# EAGLE board MARI BRD (EAGLE 9.7.0)
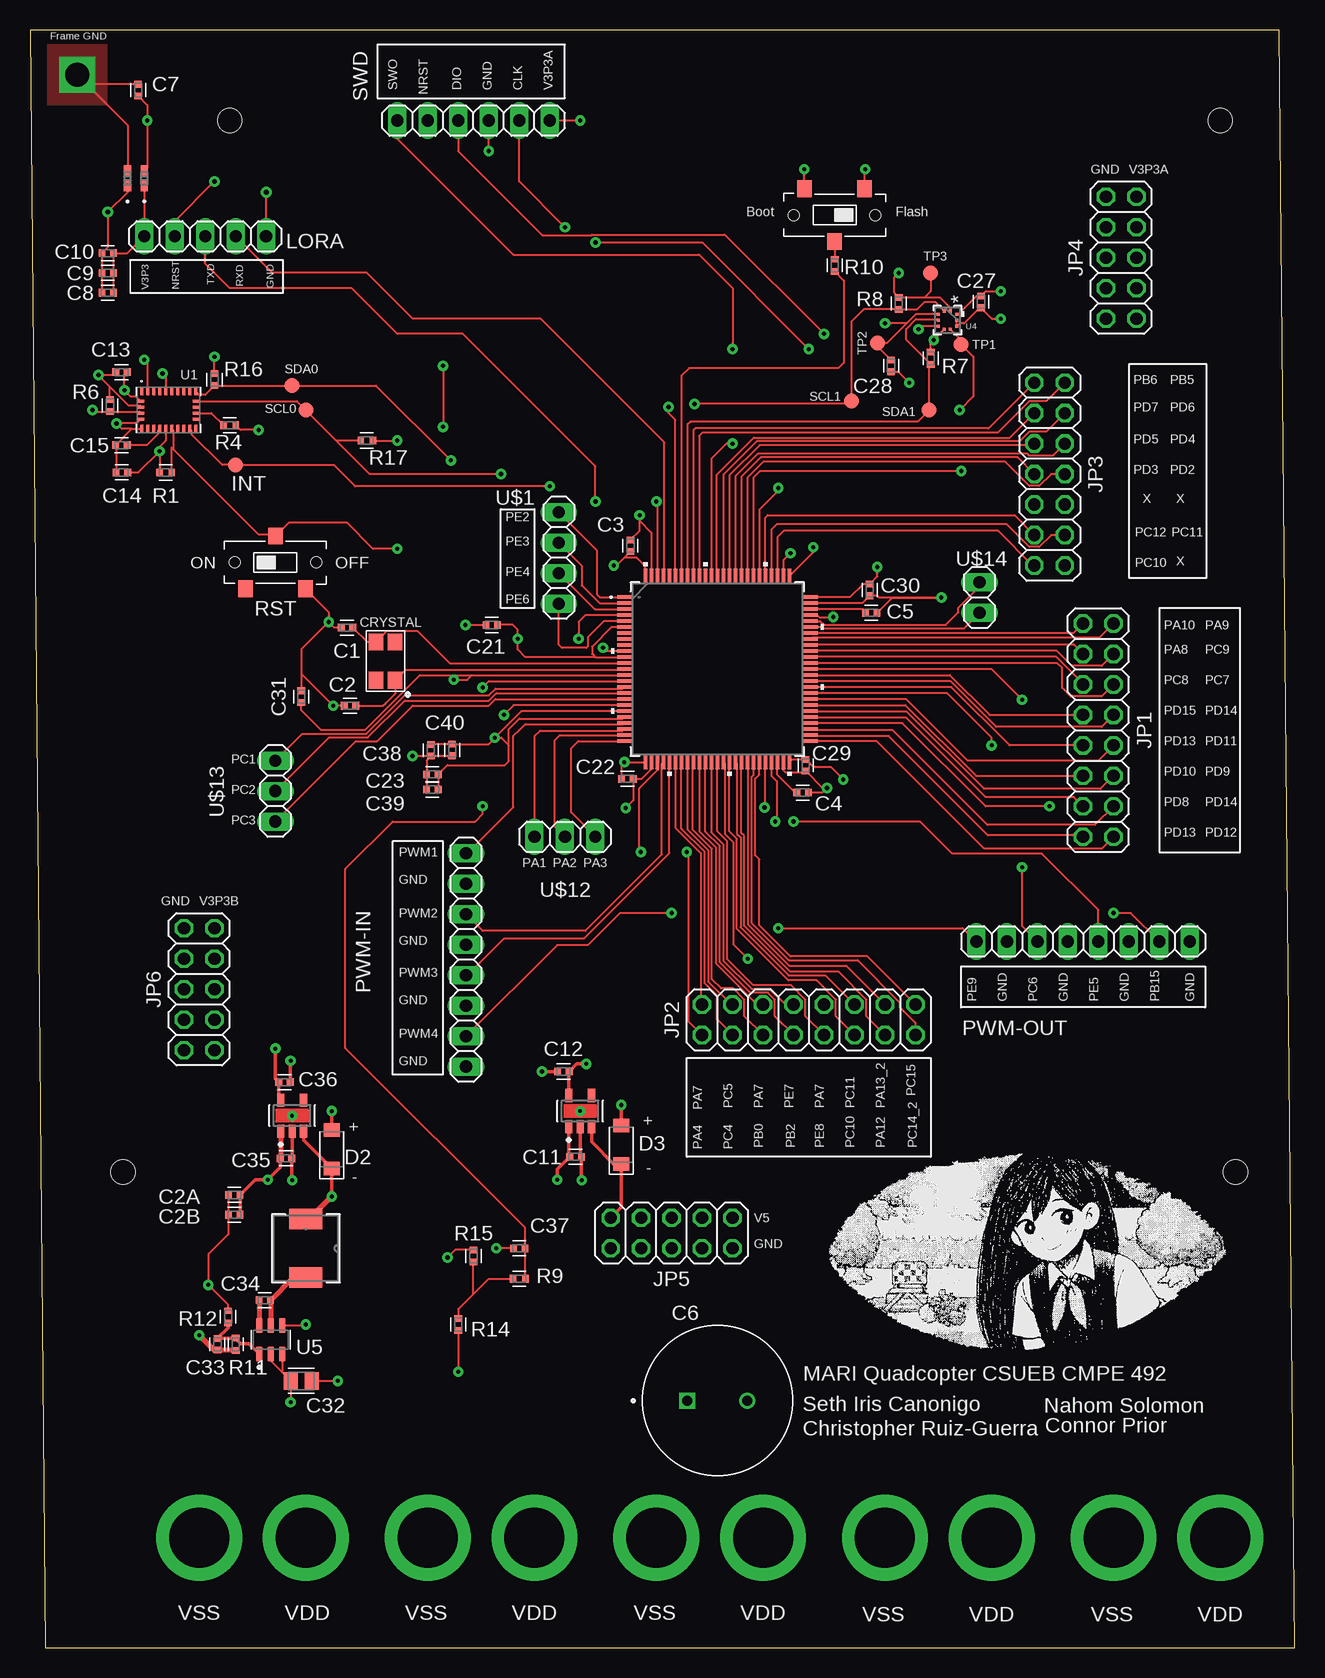
[diagram p0: board, top side]
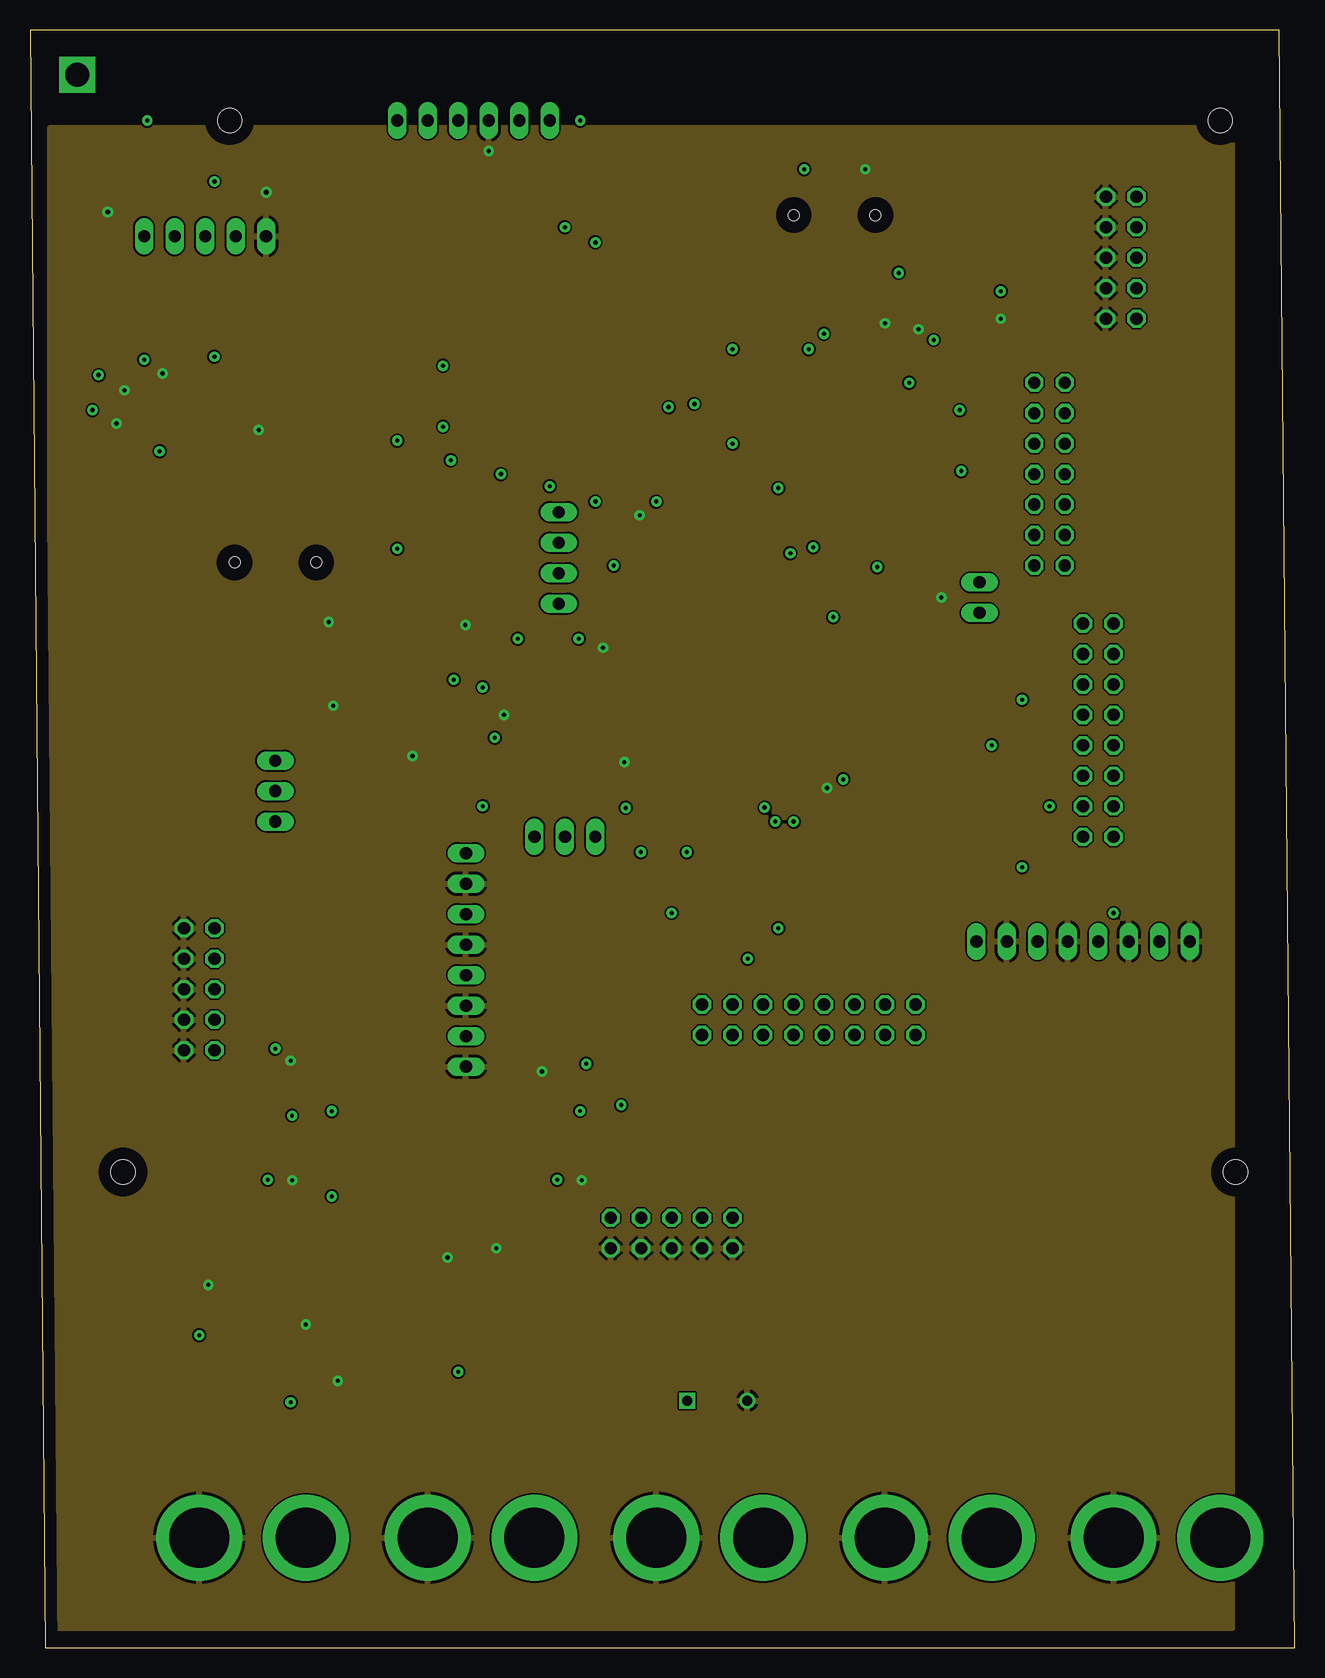
[diagram p1: board, inner layer Route2]
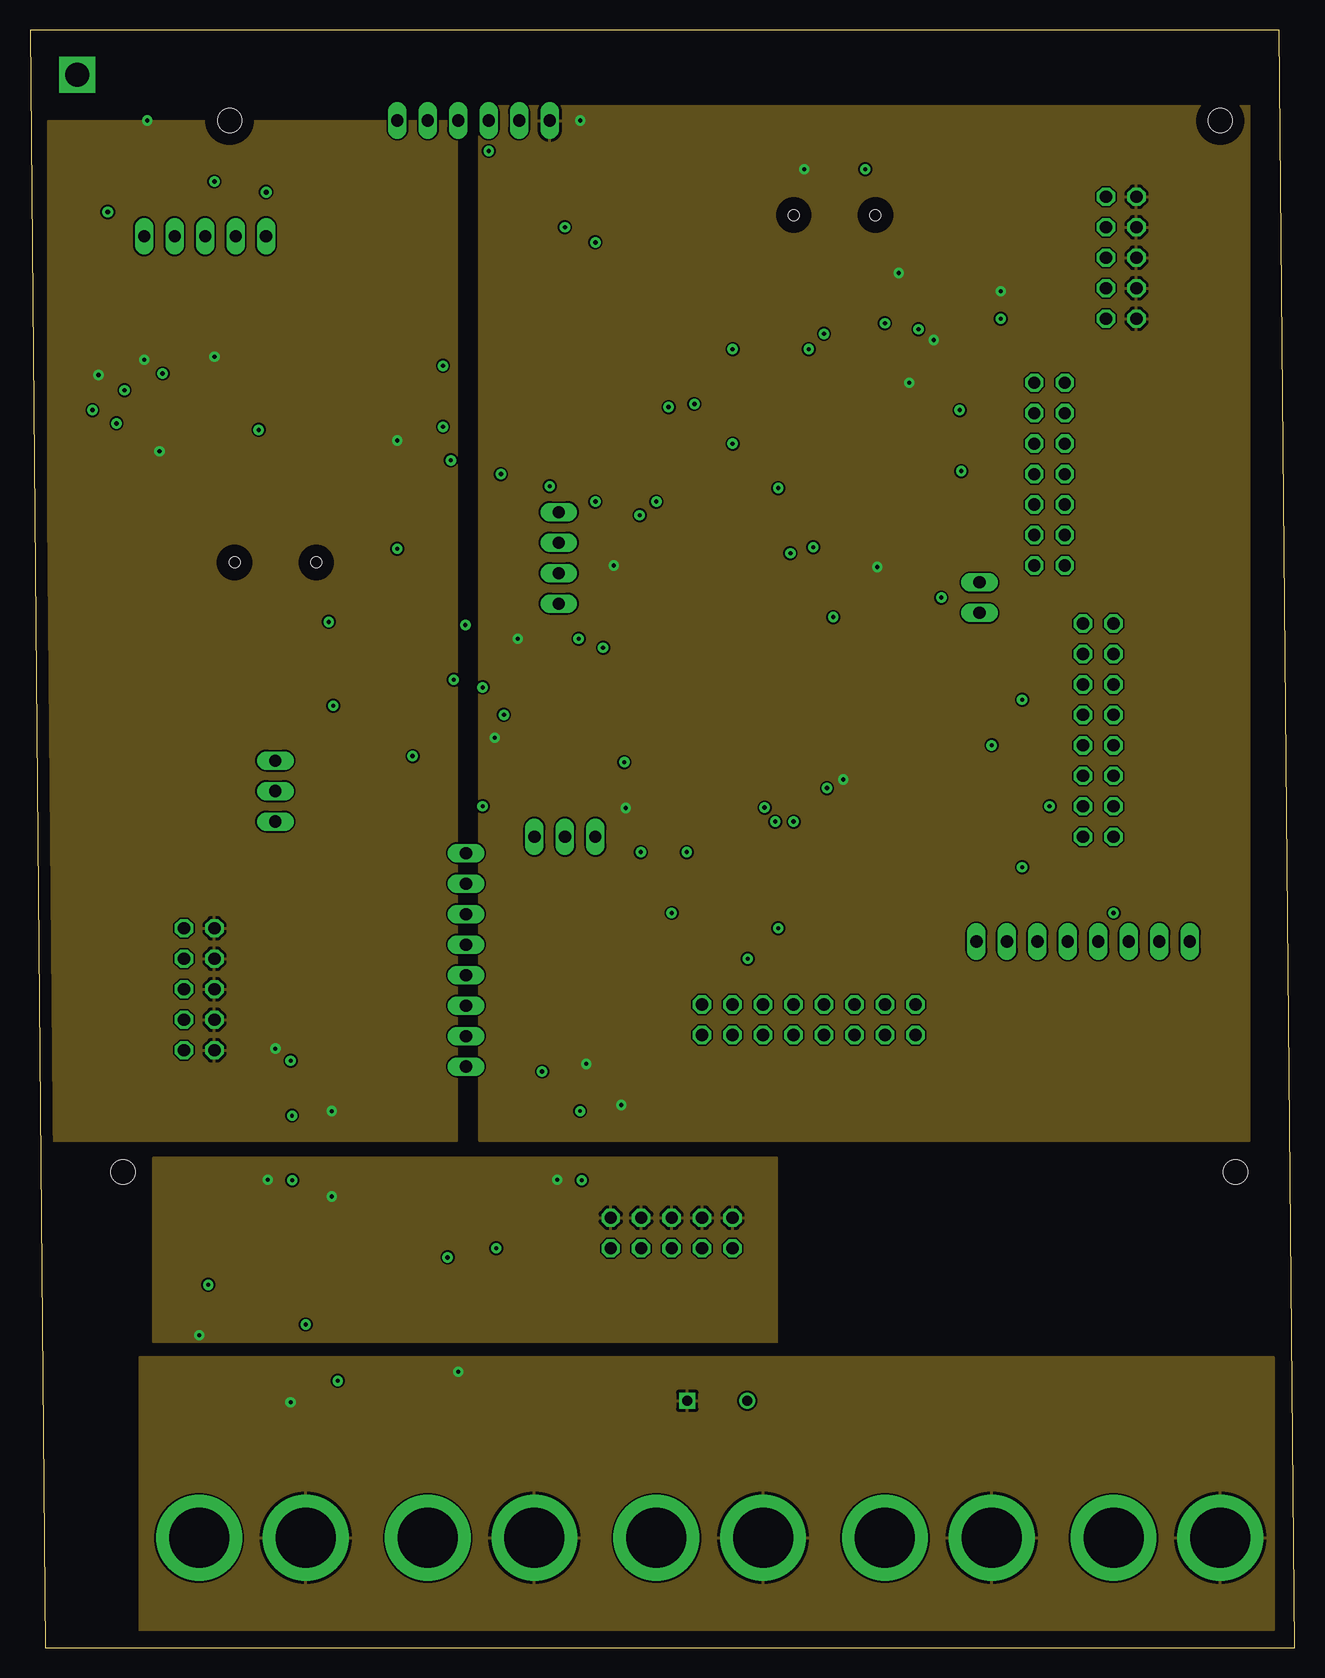
[diagram p2: board, inner layer Route15]
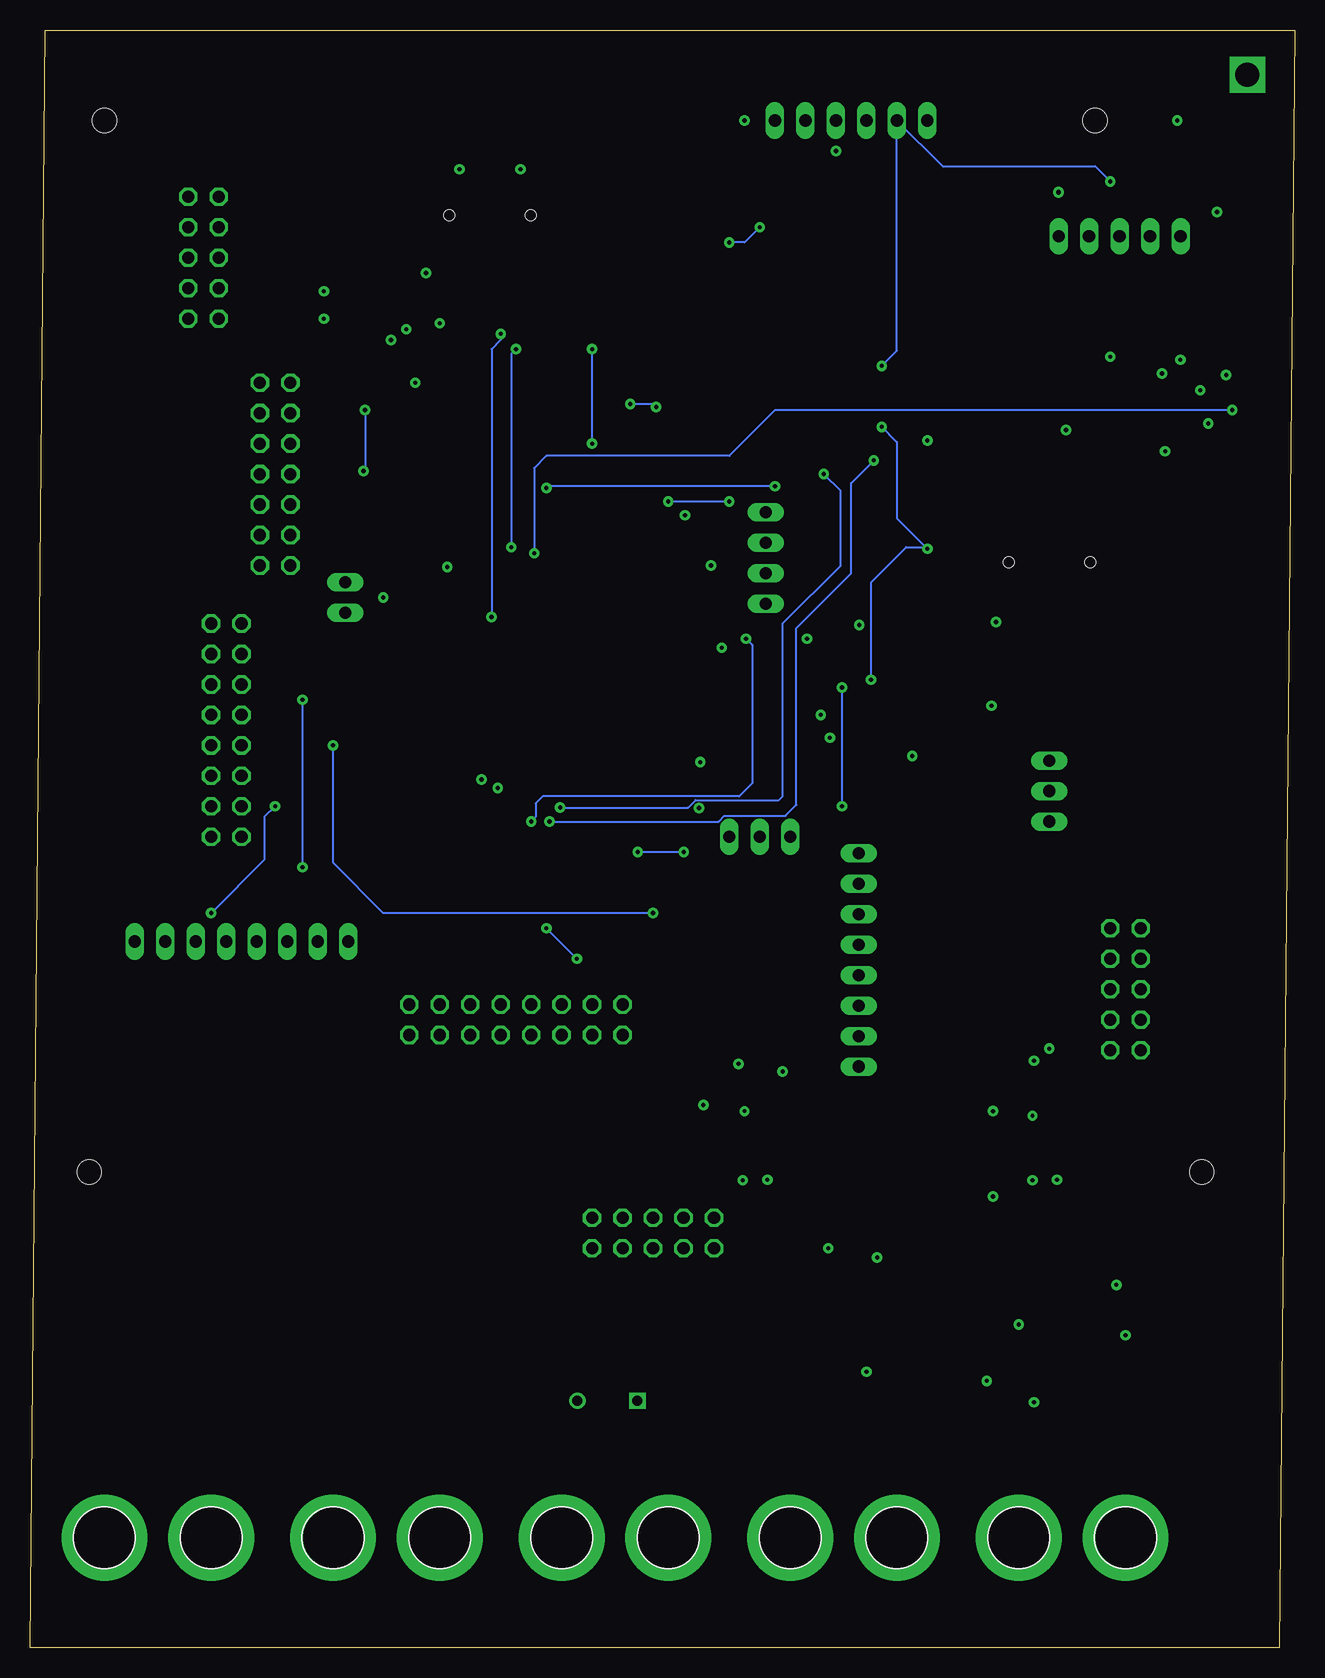
[diagram p3: board, bottom side, seen from below]

Size 105.39 x 134.8 mm. Coordinates in mm from the lower left corner, seen from the top.
Outline: 1.27,0 105.39,0 104.12,134.8 0,134.8 1.27,0
Copper layers (1*2*15*16): Top 0.035559375mm / dielectric 62mil / Route2 0.035559375mm / dielectric 62mil / Route15 0.035559375mm / dielectric 62mil / Bottom 0.035559375mm
Design rules "cmpe492-4Layer.edru": minimum track width 6mil, minimum drill 8mil, track to track 6mil, track to pad 6mil, pad to pad 6mil, via to via 6mil, smd to smd 6mil, copper to edge 40mil, drill to drill 20mil, minimum pad ring 10mil, minimum via ring 10mil, stop-mask expansion 4mil, vias tented up to drill 0mil, thermal gap 10mil
Holes 2 mm at 99.19,127.25 16.64,127.25 7.75,39.62 100.46,39.62

## Footprints (pad centres in the part's own frame; a part is rotated, then mirrored left to right if it is on the bottom)
CL-SB-12B-01T = smd 1.2 x 1.4: 1 -2.5,-2.2; 3 2.5,-2.2; C 0,2.2 | hole 0.9: -3.4,0; 3.4,0
CAPC1005X60 = smd 0.56 x 0.629: 1 -0.485,0; 2 0.485,0
CAPPRD500W60D1250H2200 = drill 0.85 pad 1.2 square: 1 -2.5,0 | drill 0.85 pad 1.2: 2 2.5,0
CAPC2012X110 = smd 1.165 x 1.465: 1 -0.875,0; 2 0.875,0
STDCRG1-16M = smd 1.4 x 1.2: P$1 -2.2,-1.6; P$2 1,-1.6; P$3 1,0; P$4 -2.2,0
SODFL3718X115 = smd 1.115 x 1.361: 1 -1.6,0; 2 1.6,0
B1,27 = smd 1.27 x 1.27: TP 0,0
2X08 = drill 1.016 octagon: 1 -8.89,-1.27; 2 -8.89,1.27; 3 -6.35,-1.27; 4 -6.35,1.27; 5 -3.81,-1.27; 6 -3.81,1.27; 7 -1.27,-1.27; 8 -1.27,1.27; 9 1.27,-1.27; 10 1.27,1.27; 11 3.81,-1.27; 12 3.81,1.27; 13 6.35,-1.27; 14 6.35,1.27; 15 8.89,-1.27; 16 8.89,1.27
2X07 = drill 1.016 octagon: 1 -7.62,-1.27; 2 -7.62,1.27; 3 -5.08,-1.27; 4 -5.08,1.27; 5 -2.54,-1.27; 6 -2.54,1.27; 7 0,-1.27; 8 0,1.27; 9 2.54,-1.27; 10 2.54,1.27; 11 5.08,-1.27; 12 5.08,1.27; 13 7.62,-1.27; 14 7.62,1.27
2X05 = drill 1.016 octagon: 1 -5.08,-1.27; 2 -5.08,1.27; 3 -2.54,-1.27; 4 -2.54,1.27; 5 0,-1.27; 6 0,1.27; 7 2.54,-1.27; 8 2.54,1.27; 9 5.08,-1.27; 10 5.08,1.27
IND_WE-LHMI_5020_WRE = smd 1.702 x 2.743: 1 -2.451,0; 2 2.451,0
IND_BLM15_0402_MUR-M = smd 0.914 x 0.61: 1 -0.622,0; 2 0.622,0
1X05 = drill 1.016 long: 1 -5.08,0; 2 -2.54,0; 3 0,0; 4 2.54,0; 5 5.08,0
1X08 = drill 1.016 long: 1 -8.89,0; 2 -6.35,0; 3 -3.81,0; 4 -1.27,0; 5 1.27,0; 6 3.81,0; 7 6.35,0; 8 8.89,0
RESC1005X40 = smd 0.535 x 0.644: 1 -0.507,0; 2 0.507,0
1X06 = drill 1.016 long: 1 -6.35,0; 2 -3.81,0; 3 -1.27,0; 4 1.27,0; 5 3.81,0; 6 6.35,0
IC_BNO085 = smd 0.25 x 0.675: 1 -2.25,1.562; 6 -2.25,-1.562; 7 -1.75,-1.562; 8 -1.25,-1.562; 9 -0.75,-1.562; 10 -0.25,-1.562; 11 0.25,-1.562; 12 0.75,-1.562; 13 1.25,-1.562; 14 1.75,-1.562; 15 2.25,-1.562; 20 2.25,1.562; 21 1.75,1.562; 22 1.25,1.562; 23 0.75,1.562; 24 0.25,1.562; 25 -0.25,1.562; 26 -0.75,1.562; 27 -1.25,1.562; 28 -1.75,1.562 | smd 0.575 x 0.25: 2 -2.312,0.75; 3 -2.312,0.25; 4 -2.312,-0.25; 5 -2.312,-0.75; 16 2.312,-0.75; 17 2.312,-0.25; 18 2.312,0.25; 19 2.312,0.75
DYD0005A-MFG = smd 1.1 x 0.6: 1 -1.3,0.95; 2 -1.3,0; 3 -1.3,-0.95; 4 1.3,-0.95; 5 1.3,0.95 | drill 0.3 pad 0.813: 8 0,0
LQFP-100_14X14MM_STM = smd 1.2 x 0.3: 1 -7.75,6; 2 -7.75,5.5; 3 -7.75,5; 4 -7.75,4.5; 5 -7.75,4; 6 -7.75,3.5; 7 -7.75,3; 8 -7.75,2.5; 9 -7.75,2; 10 -7.75,1.5; 11 -7.75,1; 12 -7.75,0.5; 13 -7.75,0; 14 -7.75,-0.5; 15 -7.75,-1; 16 -7.75,-1.5; 17 -7.75,-2; 18 -7.75,-2.5; 19 -7.75,-3; 20 -7.75,-3.5; 21 -7.75,-4; 22 -7.75,-4.5; 23 -7.75,-5; 24 -7.75,-5.5; 25 -7.75,-6; 51 7.75,-6; 52 7.75,-5.5; 53 7.75,-5; 54 7.75,-4.5; 55 7.75,-4; 56 7.75,-3.5; 57 7.75,-3; 58 7.75,-2.5; 59 7.75,-2; 60 7.75,-1.5; 61 7.75,-1; 62 7.75,-0.5; 63 7.75,0; 64 7.75,0.5; 65 7.75,1; 66 7.75,1.5; 67 7.75,2; 68 7.75,2.5; 69 7.75,3; 70 7.75,3.5; 71 7.75,4; 72 7.75,4.5; 73 7.75,5; 74 7.75,5.5; 75 7.75,6 | smd 0.3 x 1.2: 26 -6,-7.75; 27 -5.5,-7.75; 28 -5,-7.75; 29 -4.5,-7.75; 30 -4,-7.75; 31 -3.5,-7.75; 32 -3,-7.75; 33 -2.5,-7.75; 34 -2,-7.75; 35 -1.5,-7.75; 36 -1,-7.75; 37 -0.5,-7.75; 38 0,-7.75; 39 0.5,-7.75; 40 1,-7.75; 41 1.5,-7.75; 42 2,-7.75; 43 2.5,-7.75; 44 3,-7.75; 45 3.5,-7.75; 46 4,-7.75; 47 4.5,-7.75; 48 5,-7.75; 49 5.5,-7.75; 50 6,-7.75; 76 6,7.75; 77 5.5,7.75; 78 5,7.75; 79 4.5,7.75; 80 4,7.75; 81 3.5,7.75; 82 3,7.75; 83 2.5,7.75; 84 2,7.75; 85 1.5,7.75; 86 1,7.75; 87 0.5,7.75; 88 0,7.75; 89 -0.5,7.75; 90 -1,7.75; 91 -1.5,7.75; 92 -2,7.75; 93 -2.5,7.75; 94 -3,7.75; 95 -3.5,7.75; 96 -4,7.75; 97 -4.5,7.75; 98 -5,7.75; 99 -5.5,7.75; 100 -6,7.75
QFN10_BMP581_BOS = smd 0.279 x 0.254: 1 -0.76,0.25; 2 -0.76,-0.25; 6 0.76,-0.25; 7 0.76,0.25 | smd 0.254 x 0.254: 3 -0.5,-0.773; 4 0,-0.773; 5 0.5,-0.773; 8 0.5,0.773; 9 0,0.773; 10 -0.5,0.773
SOT95P280X100-6N = smd 1.24 x 0.55: 1 -1.185,0.95; 2 -1.185,0; 3 -1.185,-0.95; 4 1.185,-0.95; 5 1.185,0; 6 1.185,0.95
1X04 = drill 1.016 long: 1 -3.81,0; 2 -1.27,0; 3 1.27,0; 4 3.81,0
4MM_PLUG = drill 5 pad 7.15: P$1 0,-1.27
1X03 = drill 1.016 long: 1 -2.54,0; 2 0,0; 3 2.54,0
1X02 = drill 1.016 long: 1 -1.27,0; 2 1.27,0

## Placement (x,y rotation side)
BOOT  SPDT_SWITCH_CL-SB-12B-01T  [CL-SB-12B-01T]  67.06,119.38 180 top
C1  15pF  [CAPC1005X60]  26.42,84.99 180 top
C2  15pF  [CAPC1005X60]  26.67,78.49 180 top
C2A  22 µF  [CAPC1005X60]  17.02,37.72 180 top
C2B  22 µF  [CAPC1005X60]  17.02,36.07 180 top
C3  100nF  [CAPC1005X60]  50.04,91.82 90 top
C4  2.2uF  [CAPC1005X60]  64.39,71.25 0 top
C5  2.2uF  [CAPC1005X60]  70.1,86.23 0 top
C6  B41866C5108M000  [CAPPRD500W60D1250H2200]  57.28,20.57 0 top
C7  10 µF  [CAPC1005X60]  9.02,129.79 270 top
C8  10 µF  [CAPC1005X60]  6.48,112.9 0 top
C9  0.1 µF  [CAPC1005X60]  6.48,114.55 0 top
C10  47 pF  [CAPC1005X60]  6.48,116.2 0 top
C11  1 µF  [CAPC1005X60]  45.47,40.89 180 top
C12  1 µF  [CAPC1005X60]  44.45,48.01 0 top
C13  100nF  [CAPC1005X60]  7.62,106.28 180 top
C14  100nF  [CAPC1005X60]  7.66,97.93 0 top
C15  100nF  [CAPC1005X60]  7.62,100.2 0 top
C21  100nF  [CAPC1005X60]  38.48,85.22 180 top
C22  100nF  [CAPC1005X60]  49.78,72.39 180 top
C23  1uF  [CAPC1005X60]  33.53,72.77 0 top
C27  100nF  [CAPC1005X60]  79.25,112.14 90 top
C28  100nF  [CAPC1005X60]  71.75,106.81 270 top
C29  100nF  [CAPC1005X60]  64.64,73.53 270 top
C30  100nF  [CAPC1005X60]  69.98,88.14 270 top
C31  100nF  [CAPC1005X60]  22.61,79.25 90 top
C32  10 uF  [CAPC2012X110]  22.61,22.23 180 top
C33  47 pF  [CAPC1005X60]  15.62,25.27 270 top
C34  100 nF  [CAPC1005X60]  19.56,28.96 180 top
C35  1 µF  [CAPC1005X60]  21.34,40.77 180 top
C36  1 µF  [CAPC1005X60]  21.21,47.12 180 top
C37  100 nF  [CAPC1005X60]  40.77,33.27 180 top
C38  100nF  [CAPC1005X60]  33.4,74.77 270 top
C39  100nF  [CAPC1005X60]  33.53,71.5 0 top
C40  1uF  [CAPC1005X60]  35.18,74.8 90 top
CRYSTAL  16 MHz  [STDCRG1-16M]  28.83,82.8 90 top
D2  SCHOTTKY_MBR0520LT1GDO-219  [SODFL3718X115]  25.15,41.53 90 top
D3  SCHOTTKY_MBR0520LT1GDO-219  [SODFL3718X115]  49.28,41.91 90 top
INT  TPB1,27  [B1,27]  17.15,98.55 0 top
JP1  PINHD-2X8  [2X08]  89.03,76.45 90 top
JP2  PINHD-2X8  [2X08]  64.9,52.32 0 top
JP3  PINHD-2X7  [2X07]  84.96,97.79 270 top
JP4  PINHD-2X5  [2X05]  90.93,115.82 90 top
JP5  PINHD-2X5  [2X05]  53.47,34.54 180 top
JP6  PINHD-2X5  [2X05]  14.1,54.86 90 top
L1  74437334068IND_WE-LHMI_5020_WRE  [IND_WE-LHMI_5020_WRE]  22.99,33.27 270 top
L2  BLM15EG121SN1DIND_BLM15_0402_MUR-M  [IND_BLM15_0402_MUR-M]  9.53,122.43 90 top
L3  BLM15EG121SN1DIND_BLM15_0402_MUR-M  [IND_BLM15_0402_MUR-M]  8.13,122.43 90 top
LORA  FEMALE-HEADER-1X5  [1X05]  14.59,117.6 0 top
PWM-IN  PINHD-1X08_1X08M  [1X08]  36.33,57.31 270 top
PWM-OUT  PINHD-1X08_1X08M  [1X08]  87.76,58.84 0 top
R1  10K  [RESC1005X40]  11.3,97.92 0 top
R4  10K  [RESC1005X40]  16.64,101.85 180 top
R6  10K  [RESC1005X40]  6.66,103.51 90 top
R7  4.7K  [RESC1005X40]  75.06,107.44 270 top
R8  4.7K  [RESC1005X40]  72.39,112.01 270 top
R9  1 kΩ  [RESC1005X40]  40.77,30.73 0 top
R10  10k  [RESC1005X40]  67.06,115.19 90 top
R11  158 kΩ  [RESC1005X40]  17.15,25.27 270 top
R12  30.1 kΩ  [RESC1005X40]  16.51,27.56 270 top
R14  47.5 kΩ  [RESC1005X40]  35.69,26.92 270 top
R15  4.99 kΩ  [RESC1005X40]  36.96,32.64 270 top
R16  2.2K  [RESC1005X40]  15.37,105.66 90 top
R17  2.2K  [RESC1005X40]  28.07,100.58 0 top
RST  SPDT_SWITCH_CL-SB-12B-01T  [CL-SB-12B-01T]  20.45,90.42 0 top
SCL0  TPB1,27  [B1,27]  22.99,103.12 0 top
SCL1  TPB1,27  [B1,27]  68.45,103.89 0 top
SDA0  TPB1,27  [B1,27]  21.84,105.16 0 top
SDA1  TPB1,27  [B1,27]  74.93,103.12 0 top
SWD  PINHD-1X06_1X06M  [1X06]  36.96,127.25 180 top
TP1  TPB1,27  [B1,27]  77.6,108.58 0 top
TP2  TPB1,27  [B1,27]  70.61,108.71 0 top
TP3  TPB1,27  [B1,27]  75.06,114.55 0 top
U1  BNO085  [IC_BNO085]  11.56,103.12 0 top
U2  TLV75533PDYDRDYD0005A-MFG  [DYD0005A-MFG]  45.85,44.7 90 top
U3  STM32F756VGT6LQFP-100_14X14MM_STM  [LQFP-100_14X14MM_STM]  57.28,81.53 0 top
U4  BMP581QFN10_BMP581_BOS  [QFN10_BMP581_BOS]  76.45,110.62 270 top
U5  AP63300WU-7  [SOT95P280X100-6N]  20.07,25.65 90 top
U33  TLV75533PDYDRDYD0005A-MFG  [DYD0005A-MFG]  21.84,44.32 90 top
U$1  PINHD-1X04_1X04M  [1X04]  44.07,90.8 270 top
U$2  VDD  [4MM_PLUG]  99.19,7.87 180 bottom
U$3  VSS  [4MM_PLUG]  90.3,7.87 180 bottom
U$4  VDD  [4MM_PLUG]  80.14,7.87 180 bottom
U$5  VSS  [4MM_PLUG]  71.25,7.87 180 bottom
U$6  VDD  [4MM_PLUG]  61.09,7.87 180 bottom
U$7  VSS  [4MM_PLUG]  52.2,7.87 180 bottom
U$8  VDD  [4MM_PLUG]  42.04,7.87 180 bottom
U$9  VSS  [4MM_PLUG]  33.15,7.87 180 bottom
U$10  VDD  [4MM_PLUG]  22.99,7.87 180 bottom
U$11  VSS  [4MM_PLUG]  14.1,7.87 180 bottom
U$12  PINHD-1X03_1X03M  [1X03]  44.58,67.56 0 top
U$13  PINHD-1X03_1X03M  [1X03]  20.45,71.37 270 top
U$14  PINHD-1X02_1X02M  [1X02]  79.12,87.5 270 top

## Library data of the parts
BOOT RST = Switch; CATEGORY: Switches; DATASHEET: https://www.nidec-components.com/e/catalog/switch/cl-sb.pdf; DESCRIPTION: Slide Switch SPDT Surface Mount; MANUFACTURER: Nidec Components Corporation; MPN: CL-SB-12B-01T; OPERATING_TEMPERATURE: -40°C ~ 85°C; PACKAGE_SIZE: NA; PACKAGE_TYPE: Surface Mount; PART_STATUS: Active; ROHS: Compliant; SERIES: CL-SB; SUBCATEGORY: Slide Switches; TYPE: SPDT
C1 C2 C2A C2B C3-C5 C7-C15 C21-C23 C27-C31 C33-C40 = Capacitor; CATEGORY: Capacitor; PACKAGE_SIZE: 0402; PACKAGE_TYPE: Surface Mount; SUBCATEGORY: Ceramic Capacitors; TYPE: MLCC
C6 = B41866C5108M000; MANUFACTURER: TDK; MAXIMUM_PACKAGE_HEIGHT: 22.0 mm; PARTREV: 2018-10; STANDARD: IPC-7351B
C32 = Capacitor; CATEGORY: Capacitor; PACKAGE_SIZE: 0805; PACKAGE_TYPE: Surface Mount; SUBCATEGORY: Ceramic Capacitors; TYPE: MLCC
CRYSTAL = STDCRG1-16M
D2 D3 = Diode; CATEGORY: Diode; DATASHEET: https://www.onsemi.com/download/data-sheet/pdf/mbr0520lt1-d.pdf; DESCRIPTION: Diode 20 V 500mA Surface Mount SOD-123; FORWARD_CURRENT: 500mA; FORWARD_VOLTAGE: 385mV; MANUFACTURER: onsemi; MPN: MBR0520LT1G; OPERATING_TEMPERATURE: -65°C ~ 125°C; PACKAGE_SIZE: SOD-123; PACKAGE_TYPE: Surface Mount; PART_STATUS: Active; REVERSE_VOLTAGE: 20V; ROHS: Compliant; SERIES: MBR0520; SUBCATEGORY: Schottky Diodes; TYPE: Schottky Power Rectifier; ZENER_VOLTAGE: NA
INT SCL0 SCL1 SDA0 SDA1 TP1-TP3 = testpad
JP1 JP2 = Connector; CATEGORY: Connectors; DESCRIPTION: Header-Straight-2x8 Position; PACKAGE_TYPE: Through Hole; PITCH: 0.100" (2.54mm); SUBCATEGORY: Headers; TYPE: Male Pins
JP3 = Connector; CATEGORY: Connectors; DESCRIPTION: Header-Straight-2x7 Position; PACKAGE_TYPE: Through Hole; PITCH: 0.100" (2.54mm); SUBCATEGORY: Headers; TYPE: Male Pins
JP4-JP6 = Connector; CATEGORY: Connectors; DESCRIPTION: Header-Straight-2x5 Position; PACKAGE_TYPE: Through Hole; PITCH: 0.100" (2.54mm); SUBCATEGORY: Headers; TYPE: Male Pins
L1 = FIXED IND 6.8UH 2A 150 MOHM; COPYRIGHT: Copyright (C) 2026 Ultra Librarian. All rights reserved.; DATASHEET: https://www.we-online.com/catalog/datasheet/74437334068.pdf; DESCRIPTION: WE-LHMI SMT Power Inductor; MANUFACTURER_NAME: Wurth Electronics; MANUFACTURER_PART_NUMBER: 74437334068
L2 L3 = 2026-03-13_21-53-50_Library; COPYRIGHT: Copyright (C) 2026 Ultra Librarian. All rights reserved.; MANUFACTURER_NAME: Murata; MANUFACTURER_PART_NUMBER: BLM15EG121SN1D
LORA = Connector; CATEGORY: Connectors; DESCRIPTION: Female Header-Straight-5 Position; PACKAGE_SIZE: NA; PACKAGE_TYPE: Through Hole; PITCH: 0.100" (2.54mm); SUBCATEGORY: Headers-Female Pins
PWM-IN PWM-OUT SWD U$1 U$12-U$14 = Tinkercad
R1 R4 R6-R12 R14-R17 = Resistor; CATEGORY: Resistors; DESCRIPTION: Chip Resistor 1.05 X 0.54 X 0.40 mm body 0402(1005-METRIC) Package; PACKAGE_SIZE: 0402; PACKAGE_TYPE: Surface Mount
U1 = BNO085; AVAILABILITY: Not in stock; CHECK_PRICES: https://www.snapeda.com/parts/BNO085/Hillcrest+Laboratories%252C+Inc./view-part/?ref=eda; DESCRIPTION: Accelerometer, Gyroscope, Magnetometer, 9 Axis Sensor I²C, SPI, UART Output; MF: Hillcrest Laboratories,; MP: BNO085; PACKAGE: TFLGA-28 Hillcrest Laboratories; PRICE: None; SNAPEDA_LINK: https://www.snapeda.com/parts/BNO085/Hillcrest+Laboratories%252C+Inc./view-part/?ref=snap
U2 U33 = TLV75533PDYDR; COPYRIGHT: Copyright (C) 2025 Ultra Librarian. All rights reserved.; DATASHEET: https://www.ti.com/lit/gpn/tlv755p; DESCRIPTION: 500mA high-PSRR low-I<sub>Q</sub> low-dropout voltage regulator with enable 5-SOT-23 -40 to 125; MANUFACTURER_NAME: Texas Instruments; MANUFACTURER_PART_NUMBER: TLV75533PDYDR; REFDES: RefDes; TYPE: TYPE
U3 = STM32F756VGT6; COPYRIGHT: Copyright (C) 2025 Ultra Librarian. All rights reserved.; DATASHEET: https://www.st.com/resource/en/datasheet/stm32f756bg.pdf; DESCRIPTION: High-performance and DSP with FPU, Arm Cortex-M7 MCU with 1 Mbyte of Flash memory, 216 MHz CPU, Art Accelerator, L1 cache, HW crypto, SDRAM, TFT; MANUFACTURER_NAME: STMicroelectronics; MANUFACTURER_PART_NUMBER: STM32F756VGT6
U4 = BMP581; COPYRIGHT: Copyright (C) 2026 Ultra Librarian. All rights reserved.; MANUFACTURER_NAME: Bosch Sensortec; MANUFACTURER_PART_NUMBER: BMP581
U5 = AP63300WU-7; MANUFACTURER: DIODES; MAXIMUM_PACKAGE_HEIGHT: 1.00mm; PARTREV: 2020-04-24; STANDARD: Manufacturer Recommendations
U$2-U$11 = 4mm Banana Plug female

## Nets
BOOT: R6.1 U1.4 U3.77
FGND: C7.1 L3.2
GND: BOOT.1 C1.2 C2.2 C2A.2 C2B.2 C3.2 C4.2 C5.2 C6.2 C8.1 C9.1 C10.1 C11.1 C12.1 C13.1 C14.1 C15.1 C21.2 C22.2 C23.1 C27.1 C28.1 C29.2 C30.2 C31.2 C32.1 C35.1 C36.1 C37.2 C38.2 C39.1 C40.1 JP4.2 JP4.4 JP4.6 JP4.8 JP4.10 JP5.2 JP5.4 JP5.6 JP5.8 JP5.10 JP6.2 JP6.4 JP6.6 JP6.8 JP6.10 L3.1 LORA.5 PWM-IN.2 PWM-IN.4 PWM-IN.6 PWM-IN.8 PWM-OUT.2 PWM-OUT.4 PWM-OUT.6 PWM-OUT.8 R4.1 R12.1 R15.1 RST.3 SWD.3 TP2.TP U1.2 U1.5 U1.6 U1.25 U2.2 U3.10 U3.19 U3.26 U3.49 U3.74 U3.99 U4.3 U4.5 U4.8 U4.9 U5.4 U33.2 U$3.P$1 U$5.P$1 U$7.P$1 U$9.P$1 U$11.P$1
MONITORING: C37.1 R9.2 U3.15
N$1: C15.2 U1.9
N$3: C8.2 C9.2 C10.2 L2.1 LORA.1
N$4: C34.2 U5.6
N$6: R4.2 U1.17
N$9: C33.1 R11.1 R12.2 U5.1
N$18: C1.1 CRYSTAL.P$3 U3.12
N$21: C2.1 CRYSTAL.P$1 U3.13
N$23: C4.1 U3.48
N$24: C5.1 U3.73
N$25: R10.1 U3.94
N$26: BOOT.C R10.2
N$31: R9.1 R14.1 R15.2
NRESET: C31.1 LORA.2 R1.2 RST.C SWD.5 U1.11 U3.14
PA0: PWM-IN.1 U3.22
PA1: U3.23 U$12.1
PA2: U3.24 U$12.2
PA3: U3.25 U$12.3
PA4: JP2.1 U3.28
PA5: PWM-IN.3 U3.29
PA6: PWM-IN.5 U3.30
PA7: JP2.2 U3.31
PA8: JP1.14 U3.67
PA9: JP1.15 U3.68
PA10: JP1.16 U3.69
PA11: U3.70 U$14.2
PA12: U3.71 U$14.1
PB0: JP2.5 U3.34
PB1: JP2.6 U3.35
PB2: JP2.7 U3.36
PB5: JP3.2 U3.91
PB6: JP3.1 U3.92
PB12: JP1.1 U3.51
PB13: JP1.2 U3.52
PB13_2: JP2.14 U3.43
PB14: JP1.3 U3.53
PB14_2: JP2.15 U3.44
PB15: PWM-OUT.7 U3.54
PC1: U3.16 U$13.1
PC2: U3.17 U$13.2
PC3: U3.18 U$13.3
PC4: JP2.3 U3.32
PC5: JP2.4 U3.33
PC6: PWM-OUT.3 U3.63
PC7: JP1.11 U3.64
PC8: JP1.12 U3.65
PC9: JP1.13 U3.66
PC10: JP3.13 U3.78
PC11: JP3.12 U3.79
PC12: JP3.11 U3.80
PD0: INT.TP U1.14 U3.81
PD1: TP1.TP U3.82 U4.7
PD2: JP3.8 U3.83
PD3: JP3.7 U3.84
PD4: JP3.6 U3.85
PD5: JP3.5 U3.86
PD6: JP3.4 U3.87
PD7: JP3.3 U3.88
PD8: JP1.4 U3.55
PD9: JP1.5 U3.56
PD10: JP1.6 U3.57
PD11: JP1.7 U3.58
PD12: PWM-IN.7 U3.59
PD13: JP1.8 U3.60
PD14: JP1.9 U3.61
PD15: JP1.10 U3.62
PE2: U3.1 U$1.1
PE3: U3.2 U$1.2
PE4: U3.3 U$1.3
PE5: PWM-OUT.5 U3.4
PE6: U3.5 U$1.4
PE7: JP2.8 U3.37
PE8: JP2.9 U3.38
PE9: PWM-OUT.1 U3.39
PE10: JP2.11 U3.40
PE11: JP2.12 U3.41
PE12: JP2.13 U3.42
PE15: JP2.16 U3.45
RXD: LORA.4 U3.97
SCL: R17.1 SCL0.TP U1.19 U3.46
SCL1: R8.2 SCL1.TP U3.95 U4.2
SDA1: R7.2 SDA1.TP U3.93 U4.4
SDA/BNO: R16.1 SDA0.TP U1.20 U3.47
SW: C34.1 L1.2 U5.5
TCK/SWCLK: SWD.2 U3.76
TDO/SWO: SWD.6 U3.89
TMS/SWDIO: SWD.4 U3.72
TXD: LORA.3 U3.98
V3P3A: BOOT.3 C3.1 C12.2 C21.1 C22.1 C23.2 C27.2 C28.2 C29.1 C30.1 C38.1 C39.2 C40.2 D3.2 JP4.1 JP4.3 JP4.5 JP4.7 JP4.9 R7.1 R8.1 SWD.1 TP3.TP U2.5 U3.6 U3.11 U3.20 U3.21 U3.27 U3.50 U3.75 U3.100 U4.1 U4.6 U4.10
V3P3B: C7.2 C13.2 C14.2 C36.2 D2.2 JP6.1 JP6.3 JP6.5 JP6.7 JP6.9 L2.2 R1.1 R6.2 R16.2 R17.2 U1.3 U1.10 U1.28 U33.5
V5: C2A.1 C2B.1 C11.2 C33.2 C35.2 D2.1 D3.1 JP5.1 JP5.3 JP5.5 JP5.7 JP5.9 L1.1 R11.2 U2.1 U2.3 U33.1 U33.3
V14P8: C6.1 C32.2 R14.2 U5.2 U5.3 U$2.P$1 U$4.P$1 U$6.P$1 U$8.P$1 U$10.P$1

## Tracks (layer width: path | path; a pad name or v marks a point on that pad's centre or on a via)
BOOT  (via drill 0.35)
  Top 0.152: U1.4 9.11,103 R6.1 5.33,103 v5.21,103.12 | v63.37,91.19 62.78,90.59 U3.77
  Bottom 0.152: v5.21,103.12 43.31,103.12 47.12,99.31 62.36,99.31 63.37,98.3 v63.37,91.19
FGND  (via drill 1.99)
  Top 0.152: L3.2 8.13,126.87 v3.94,131.06 4.72,130.28 C7.1
  pour Top: 1.47,128.6 6.4,128.6 6.4,133.53 1.47,133.53
GND  (via drill 0.35, 0.4)
  Top 0.152: R15.1 | R15.1 35.43,33.15 v34.8,32.51 | C37.2 v38.86,33.27 | U3.74 69.36,87.03 C30.2 70.61,87.65 70.76,87.5 v75.95,87.5 71.86,87.5 C5.2 | C40.1 33.43,74.32 C38.2 | C38.2 v31.88,74.29 v31.88,74.3 | C38.2 33.04,73.93 C23.1 C39.1 | BOOT.1 69.56,123.15 v69.6,123.19 | U3.99 51.78,92.91 50.8,93.88 | 50.8,93.88 v50.8,94.36 | v49.53,73.78 U3.26 | v49.53,73.78 v49.53,73.79 | U3.49 62.78,73.11 62.94,72.95 64.54,72.95 C29.2 66.06,71.63 v66.42,71.63 66.04,71.25 C4.2 | v36.28,85.22 C21.2 | C2.2 v25.27,78.49 22.61,81.15 | C1.2 25.37,84.99 v24.89,85.47 | U3.10 48.03,83.03 v47.75,83.31 | U3.19 40.31,78.53 v39.5,77.72 | C22.2 49.3,73.55 v49.53,73.78 | C3.2 50.8,93.07 50.8,93.88 | 22.61,81.15 C31.2 | 73.06,110.36 v71.25,110.36 | 73.06,110.36 73.8,111.1 75.66,111.1 U4.3 | 73.06,110.36 71.41,108.71 TP2.TP 70.61,108.44 C28.1 | v80.9,110.74 80.16,110.74 C27.1 79.14,111.66 77.84,110.35 77.46,110.35 U4.8 U4.9 | LORA.5 19.69,117.62 v19.69,121.28 | RST.3 24.89,86.28 v24.89,85.47 | v24.89,85.47 22.61,83.19 22.61,81.15 | v38.23,124.71 SWD.3 | U4.5 74.3,110.12 v74.04,109.85 | U1.2 8.87,104.25 8.4,104.25 v7.87,104.77 7.87,106.05 C13.1 | v11.05,106.17 11.31,105.91 U1.25 | C32.1 v25.65,22.23 | v22.99,26.92 22.9,26.84 U5.4 | R12.1 16.51,28.57 v14.86,30.23 14.86,32.77 16.53,34.44 C2B.2 C2A.2 | v19.05,101.47 17.53,101.47 R4.1 | C8.1 C9.1 C10.1 6.48,116.69 v6.48,119.63 8.13,121.28 L3.1 | 8.49,101.56 7.66,101.56 v7.21,102.01 8.88,102.01 U1.5 | 8.49,101.56 C15.1 7.17,100.17 C14.1 | 8.49,101.56 U1.6
  Top 0.305: U33.2 21.84,40.79 C35.1 21.82,38.97 v21.86,38.94 | C36.1 21.69,48.87 v21.72,48.9 | v45.99,38.94 45.95,38.97 C11.1 45.85,41 U2.2 | v42.67,48.01 C12.1
  pour Route2: 1.65,1.65 100.2,1.65 100.2,126.62 1.65,126.62
MONITORING  (via drill 0.35)
  Top 0.152: R9.2 41.25,30.76 C37.1 41.25,34.98 26.29,49.95 26.29,64.9 30.23,68.83 37.08,68.83 37.72,69.47 v37.72,70.1 | v37.72,80.01 38.24,80.53 U3.15
  Bottom 0.152: v37.72,70.1 v37.72,80.01
N$1
  Top 0.152: U1.9 10.66,101.41 10.66,101.13 9.73,100.2 C15.2
N$3
  Top 0.152: L2.1 9.53,117.62 LORA.1 8.11,116.2 C10.2 C9.2 C8.2
N$4
  Top 0.406: C34.2 19.12,28.91 U5.6
N$6
  Top 0.152: U1.17 15.11,102.87 R4.2
N$9
  Top 0.305: 17.12,25.76 R11.1 | R12.2 16.51,26.65 C33.1 17.12,25.76 | 17.12,25.76 17.54,25.34 18.25,25.34 U5.1
N$18
  Top 0.152: U3.12 34.97,82.03 32.27,84.73 29.73,84.73 29.6,84.6 29.6,84.57 CRYSTAL.P$3 28.09,83.8 C1.1
N$21
  Top 0.152: U3.13 49.42,81.43 31.25,81.43 CRYSTAL.P$1 30.43,79.5 29.63,78.7 29.41,78.49 C2.1
N$23
  Top 0.152: U3.48 62.28,72.72 63.75,71.25 C4.1
N$24
  Top 0.152: C5.1 69.62,86.35 69.44,86.53 U3.73
N$25
  Top 0.152: R10.1 67.82,113.92 67.82,107.06 67.37,106.62 54.93,106.62 54.28,105.97 U3.94
N$26
  Top 0.152: BOOT.C R10.2
N$31
  Top 0.152: R14.1 35.69,28.19 36.96,29.46 | 36.96,29.46 R15.2 | 36.96,29.46 38.23,30.73 R9.1
NRESET  (via drill 0.35)
  Top 0.152: v30.61,91.57 28.58,91.57 26.38,93.77 21.59,93.77 20.62,92.79 | 36.83,81.03 32.48,81.03 27.9,76.45 24.26,76.45 22.61,78.1 C31.1 | v35.31,80.64 36.44,80.64 36.83,81.03 | 36.83,81.03 U3.14 | RST.C 20.62,92.79 | v15.37,122.17 12.05,118.86 LORA.2 | U1.11 11.95,101.41 11.95,99.86 | 11.95,99.86 11.81,100 R1.2 | 11.95,99.86 19.02,92.79 20.62,92.79 | v34.42,106.81 v34.42,101.73
  Bottom 0.152: v35.31,80.64 35.31,88.77 32.38,91.69 30.73,91.69 | 30.73,91.69 v30.61,91.57 | v15.37,122.17 16.64,123.44 29.34,123.44 SWD.5 33.15,108.08 v34.42,106.81 | v34.42,101.73 33.15,100.46 33.15,94.11 30.73,91.69
PA0
  Top 0.152: PWM-IN.1 36.45,66.2 40.28,70.03 40.28,75.97 40.77,76.45 41.28,76.96 49.46,76.96 U3.22
PA1
  Top 0.152: U$12.1 42.04,75.95 42.5,76.41 49.41,76.41 U3.23
PA2
  Top 0.152: U3.24 44.16,76.03 43.69,75.56 43.69,68.45 U$12.2
PA3
  Top 0.152: U$12.3 45.09,69.6 45.09,74.93 45.69,75.53 U3.25
PA4  (via drill 0.35)
  Top 0.152: U3.28 52.32,73.74 52.32,73.15 50.78,71.61 50.78,66.42 v50.9,66.29 | v54.74,66.29 54.89,66.14 54.89,52.17 JP2.1
  Bottom 0.152: v50.9,66.29 v54.74,66.29
PA5
  Top 0.152: U3.29 52.66,73.66 52.66,66.1 46.28,59.72 37.73,59.72 PWM-IN.3
PA6
  Top 0.152: U3.30 53.28,66.21 46.15,59.08 39.5,59.08 36.45,56.04 PWM-IN.5
PA7
  Top 0.152: JP2.2 55.91,53.7 55.91,66.19 53.78,68.32 U3.31
PA8
  Top 0.152: U3.67 65.06,83.57 87.02,83.57 87.76,82.83 JP1.14
PA9
  Top 0.152: U3.68 65.15,84.16 89.11,84.16 JP1.15
PA10
  Top 0.152: JP1.16 86.95,84.53 U3.69
PA11
  Top 0.152: U3.70 65.92,85.03 66.04,84.91 77.8,84.91 U$14.2
PA12
  Top 0.152: U3.71 65.85,85.53 66.17,85.22 76.33,85.22 77.37,86.26 77.37,86.64 79.12,88.4 U$14.1
PB0
  Top 0.152: U3.34 55.25,73.75 55.25,68.15 56.82,66.57 56.82,55.7 57.59,54.93 58.61,54.93 59.54,54 59.54,52.6 JP2.5
PB1
  Top 0.152: U3.35 55.78,68.05 57.15,66.67 57.15,57.02 60.58,53.59 JP2.6
PB2
  Top 0.152: U3.36 56.28,68.01 57.48,66.8 57.48,57.12 60.02,54.59 61.5,54.59 62.08,54 62.08,52.6 JP2.7
PB5
  Top 0.152: JP3.2 84.68,103.86 83.28,103.86 80.66,101.24 56.03,101.24 55.75,100.96 55.75,89.31 U3.91
PB6
  Top 0.152: JP3.1 79.88,101.6 55.45,101.6 55.28,101.43 U3.92
PB12
  Top 0.152: U3.51 70.54,75.53 79.5,66.57 89.31,66.57 JP1.1
PB13
  Top 0.152: JP1.2 87.63,67.69 79.83,67.69 71.58,75.95 65.12,75.95 U3.52
PB13_2
  Top 0.152: JP2.14 68.01,56.83 63.26,56.83 59.82,60.27 59.82,73.74 U3.43
PB14
  Top 0.152: U3.53 65.11,76.45 71.88,76.45 79.78,68.55 88.75,68.55 JP1.3
PB14_2
  Top 0.152: JP2.15 73.79,52.07 72.49,53.37 72.49,53.75 68.96,57.28 63.24,57.28 60.12,60.4 60.12,72.53 60.28,72.69 U3.44
PB15  (via drill 0.35)
  Top 0.152: U3.54 72.7,77.03 79.63,70.1 v84.96,70.1 | PWM-OUT.7 91.74,61.21 v90.3,61.21
  Bottom 0.152: v90.3,61.21 85.85,65.66 85.85,69.22 v84.96,70.1
PC1
  Top 0.152: U3.16 49.41,79.91 38.81,79.91 38.25,79.35 31.23,79.35 28.03,76.15 22.68,76.15 U$13.1
PC2
  Top 0.152: U3.17 38.86,79.53 38.25,78.92 31.23,78.92 28.16,75.84 24.92,75.84 U$13.2
PC3
  Top 0.152: U3.18 38.79,79.03 38.24,78.49 31.88,78.49 28.93,75.54 27.15,75.54 U$13.3
PC4
  Top 0.152: JP2.3 57.25,52.35 57.25,54.33 56.21,55.37 56.21,66.32 54.28,68.25 U3.32
PC5
  Top 0.152: JP2.4 58.42,53.59 56.52,55.5 56.52,66.45 54.78,68.19 U3.33
PC6  (via drill 0.35)
  Top 0.152: v82.68,78.99 80.14,81.53 U3.63 | PWM-OUT.3 82.68,60.12 v82.68,65.02
  Bottom 0.152: v82.68,65.02 v82.68,78.99
PC7
  Top 0.152: U3.64 85.6,82.03 86,81.63 86,79.98 86.71,79.27 89.31,79.27 JP1.11
PC8
  Top 0.152: U3.65 65.04,82.55 85.52,82.55 87.76,80.31 JP1.12
PC9
  Top 0.152: U3.66 65.05,83.06 85.57,83.06 86.82,81.81 89.3,81.81 JP1.13
PC10
  Top 0.152: JP3.13 83.57,90.17 80.69,93.05 62.8,93.05 62.27,92.52 U3.78
PC11
  Top 0.152: U3.79 61.78,93.16 62.24,93.62 81.38,93.62 83.28,91.72 84.1,91.72 85.09,92.71 JP3.12
PC12
  Top 0.152: JP3.11 82.04,94.36 61.47,94.36 61.28,94.17 U3.80
PD0  (via drill 0.35)
  Top 0.152: U3.81 60.78,94.81 62.36,96.39 v62.36,96.62 | v43.31,96.77 27.1,96.77 25.32,98.55 INT.TP 16.03,98.55 13.45,101.13 13.45,101.41 U1.14
  Bottom 0.152: v43.31,96.77 62.21,96.77 v62.36,96.62
PD1  (via drill 0.35)
  Top 0.152: U3.82 60.28,97.49 60.83,98.04 v77.6,98.04 | v77.47,103.12 78.61,104.26 78.61,107.57 TP1.TP 77.6,108.81 77.6,108.96 U4.7
  Bottom 0.152: v77.47,103.12 77.47,98.17 v77.6,98.04
PD2
  Top 0.152: JP3.8 85.09,97.79 84.1,96.8 83.28,96.8 81.25,98.83 61.11,98.83 59.78,97.5 U3.83
PD3
  Top 0.152: JP3.7 82.3,99.19 60.91,99.19 59.28,97.56 U3.84
PD4
  Top 0.152: JP3.6 85.24,99.34 83.28,99.34 83.13,99.49 60.65,99.49 58.78,97.62 U3.85
PD5
  Top 0.152: JP3.5 83.57,100.2 60.81,100.2 58.28,97.67 U3.86
PD6
  Top 0.152: JP3.4 84.68,101.32 83.28,101.32 82.47,100.51 60.55,100.51 57.78,97.73 U3.87
PD7
  Top 0.152: JP3.3 81.66,100.84 60.33,100.84 57.22,97.73 57.22,89.35 U3.88
PD8
  Top 0.152: JP1.4 86.99,70.87 79.63,70.87 73.03,77.47 65.09,77.47 U3.55
PD9
  Top 0.152: U3.56 65.08,77.98 73.08,77.98 79.5,71.55 89.21,71.55 JP1.5
PD10
  Top 0.152: JP1.6 78.84,72.64 72.95,78.53 U3.57
PD11
  Top 0.152: JP1.7 89.03,73.91 78.13,73.91 73.01,79.03 U3.58
PD12  (via drill 0.35)
  Top 0.152: PWM-IN.7 43.92,58.55 46.48,58.55 49.15,61.21 v53.47,61.21 | v80.14,75.18 80.14,75.82 76.42,79.53 U3.59
  Bottom 0.152: v53.47,61.21 75.95,61.21 80.14,65.41 v80.14,75.18
PD13
  Top 0.152: JP1.8 81.64,75.18 76.79,80.03 U3.60
PD14
  Top 0.152: U3.61 76.72,80.53 80.52,76.73 89.31,76.73 JP1.9
PD15
  Top 0.152: U3.62 76.65,81.03 79.96,77.72 JP1.10
PE2
  Top 0.152: U$1.1 47.24,91.44 47.24,87.76 47.47,87.53 U3.1
PE3
  Top 0.152: U$1.2 45.97,90.17 45.97,88.52 47.46,87.03 U3.2
PE4
  Top 0.152: U$1.3 47.07,86.53 U3.3
PE5  (via drill 0.35)
  Top 0.152: v63.63,68.83 74.17,68.83 76.84,66.17 84.33,66.17 89.03,61.47 PWM-OUT.5 | v45.72,84.07 45.72,85.47 46.29,86.03 U3.4
  Bottom 0.152: v63.63,68.83 63.25,69.22 63.25,70.36 62.67,70.93 46.29,70.93 45.21,72.01 45.21,83.57 v45.72,84.07
PE6
  Top 0.152: U$1.4 44.07,83.57 44.32,83.31 46.35,83.31 46.48,83.44 46.48,84.2 47.81,85.53 U3.5
PE7
  Top 0.152: U3.37 56.77,67.94 57.78,66.93 57.78,57.25 60.15,54.89 61.62,54.89 62.92,53.59 JP2.8
PE8
  Top 0.152: JP2.9 64.62,52.6 64.62,54 63.43,55.19 60.27,55.19 58.09,57.38 58.09,67.21 57.28,68.02 U3.38
PE9  (via drill 0.35)
  Top 0.152: v62.36,59.94 77.72,59.94 78.85,58.82 PWM-OUT.1 | U3.39 57.9,73.66 57.9,67.83 58.6,67.13 58.6,58.62 v59.82,57.4
  Bottom 0.152: v59.82,57.4 v62.36,59.94
PE10
  Top 0.152: JP2.11 67.16,52.6 67.16,54 65.56,55.6 63.2,55.6 58.91,59.89 58.91,67.38 58.28,68.01 U3.40
PE11
  Top 0.152: U3.41 58.9,73.66 58.9,67.82 59.21,67.51 59.21,60.02 63.21,56.02 66.28,56.02 JP2.12
PE12
  Top 0.152: JP2.13 69.7,52.6 69.7,54 67.38,56.33 63.34,56.33 59.52,60.15 59.52,67.64 59.28,67.87 U3.42
PE15
  Top 0.152: JP2.16 69.79,57.59 63.36,57.59 60.78,60.18 60.78,65.67 60.43,66.02 60.43,72.41 60.78,72.76 U3.45
RXD
  Top 0.152: U3.97 52.85,89.36 52.85,100.43 42.55,110.74 31.88,110.74 28.07,114.55 20.18,114.55 LORA.4
SCL  (via drill 0.35)
  Top 0.152: v61.21,70 61.28,70.06 U3.46 | v39.24,97.79 28.32,97.79 25.53,100.58 | U1.19 22.24,103.87 SCL0.TP 25.53,100.58 | R17.1 25.53,100.58
  Bottom 0.152: v39.24,97.79 37.85,96.39 37.85,90.17 42.67,85.34 42.67,70.94 42.99,70.62 49.92,70.62 50.55,70 v61.21,70
SCL1  (via drill 0.35)
  Top 0.152: 73.91,111.51 R8.2 69.47,111.51 68.45,110.49 SCL1.TP 68.2,103.63 v55.37,103.63 | 73.91,111.51 | 73.91,111.51 74.55,112.14 75.44,112.14 75.91,111.67 U4.2 | U3.95 53.78,102.31 53.21,102.87 v53.21,103.38
  Bottom 0.152: v55.37,103.63 53.47,103.63 v53.21,103.38
SDA1
  Top 0.152: U3.93 54.78,101.89 55.04,102.16 73.97,102.16 SDA1.TP 74.93,106.81 R7.2 73,108.99 73,109.87 73.83,110.7 75.6,110.7 U4.4
SDA/BNO  (via drill 0.35)
  Top 0.152: v62.1,68.83 62.23,68.96 62.23,72.21 61.78,72.67 U3.47 | U1.20 14.1,104.39 14.6,104.39 R16.1 SDA0.TP | v35.08,98.93 35.05,98.93 28.83,105.16 SDA0.TP | SDA0.TP
  Bottom 0.152: v62.1,68.83 48.01,68.83 47.53,69.32 42.45,69.32 41.53,70.23 41.53,84.96 36.96,89.53 36.96,97.03 35.08,98.91 v35.08,98.93
SW
  Top 0.406: U5.5 20.07,28.93 C34.1 21.91,30.82 L1.2
TCK/SWCLK  (via drill 0.35)
  Top 0.152: v64.9,108.2 56.01,117.09 v47.12,117.09 | v65.28,91.69 65.28,91.28 U3.76 | v44.58,118.36 40.77,122.17 SWD.2
  Bottom 0.152: v64.9,108.2 65.28,107.82 v65.28,91.69 | v44.58,118.36 45.85,117.09 v47.12,117.09
TDO/SWO  (via drill 0.35)
  Top 0.152: v58.55,108.2 58.55,113.28 55.75,116.08 40.27,116.08 30.61,125.74 SWD.6 | v58.55,100.33 58.04,100.33 56.78,99.07 U3.89
  Bottom 0.152: v58.55,100.33 v58.55,108.2
TMS/SWDIO  (via drill 0.35)
  Top 0.152: U3.72 65.6,86.03 65.76,85.88 v66.93,85.88 | SWD.4 35.69,124.71 42.69,117.71 46.8,117.71 46.84,117.75 57.89,117.75 v66.17,109.47
  Bottom 0.152: v66.93,85.88 66.93,108.2 66.17,108.97 v66.17,109.47
TXD  (via drill 0.35)
  Top 0.152: v47.12,95.5 47.12,98.42 36.07,109.47 30.61,109.47 26.8,113.28 16.64,113.28 14.59,115.33 LORA.3 | v52.2,95.5 52.28,95.42 U3.98
  Bottom 0.152: v47.12,95.5 v52.2,95.5
V3P3A  (via drill 0.35)
  Top 0.152: U3.75 68.33,87.53 69.42,88.62 C30.1 70.61,89.26 v70.61,90.04 | 47.12,82.53 U3.11 | 47.12,82.53 41.29,82.53 40.64,83.19 v40.64,84.07 40.64,84.81 40.24,85.22 C21.1 | v49.65,69.97 50.28,70.6 50.28,72.38 C22.1 50.96,72.39 51.78,73.21 U3.27 | U3.50 63.51,74.02 C29.1 65.28,73.38 66.73,73.38 v67.77,72.34 | 47.12,82.53 46.84,82.81 46.84,83.42 48.46,85.03 U3.6 | U3.100 51.28,90.1 50.56,90.82 49.52,90.82 | C3.1 49.52,90.82 | 49.52,90.82 48.87,90.17 v48.64,90.17 | C38.1 35.15,75.26 C40.2 38.23,75.29 38.74,75.8 v38.74,75.82 | U3.20 40.96,78.04 v38.74,75.82 | C39.2 C23.2 34.78,73.53 39.57,73.53 39.92,73.88 39.92,75.18 | U3.21 49.41,77.41 40.78,77.41 39.92,76.55 39.92,75.18 | 74.55,112.52 R8.1 72.01,112.9 72.01,114.17 v72.39,114.55 | 74.55,112.52 75.82,112.52 76.33,112.01 76.7,111.64 U4.1 | R7.1 75.06,108.71 v75.31,108.97 75.31,109.32 75.66,109.32 U4.6 | TP3.TP 75.06,113.03 74.55,112.52 | v80.9,113.03 79.65,113.03 C27.2 78.87,112.63 77.36,111.12 U4.10 | C28.2 72.37,106.32 v73.28,105.41 | BOOT.3 64.52,121.62 v64.52,123.19 | v38.74,75.82 39.28,75.82 39.92,75.18 | v45.85,127.25 SWD.1
  Top 0.305: U2.5 44.9,47.97 C12.2 45.57,48.64 v46.35,48.64 | D3.2 v49.28,45.21
  pour Route15: 37.41,42.24 101.65,42.24 101.65,128.45 37.41,128.45
V3P3B  (via drill 0.35)
  Top 0.152: L2.2 9.78,123.3 v9.78,127.25 9.78,128.55 C7.2 | U1.28 9.81,107.03 v9.53,107.31 | U1.3 9.1,103.52 8.2,103.52 6.66,105.05 | R6.2 6.66,105.05 | 6.66,105.05 5.72,106 v5.72,106.05 6.9,106.05 C13.2 | R17.2 v30.61,100.58 | R16.2 v15.37,107.57 | U1.10 11.31,100.58 10.8,100.07 v10.8,99.69 | v10.8,99.69 R1.1 | C14.2 9.03,97.93 v10.8,99.69
  Top 0.305: D2.2 v25.15,44.7 | U33.5 20.72,45.79 C36.2 20.45,47.39 v20.45,49.91
  pour Route15: 1.47,42.24 35.61,42.24 35.61,127.18 1.47,127.18
V5  (via drill 0.35)
  Top 0.305: 20.89,40.81 C35.2 20.85,40.03 v19.81,38.99 18.77,38.99 C2A.1 C2B.1 | v25.15,37.59 D2.1 22.79,42.28 U33.3 | U2.1 44.9,40.98 C11.2 43.94,39.86 v43.94,38.99 | U2.3 46.8,42.13 48.62,40.31 D3.1 49.28,36.7 JP5.9
  Top 0.406: U33.1 20.89,40.81 | R11.2 17.12,24.79 C33.2 15.34,24.79 v14.1,26.04 | v25.15,37.59 23.28,35.73 L1.1
  pour Route15: 10.24,25.48 62.28,25.48 62.28,40.82 10.24,40.82
V14P8  (via drill 0.35)
  Top 0.152: R14.2 v35.69,22.99 | U5.3 21.02,22.94 C32.2 | C32.2 20.07,23.89 U5.2 | C32.2 21.73,20.46 v21.72,20.45
  pour Route15: 9.09,1.47 103.68,1.47 103.68,24.18 9.09,24.18

## Text on the board
tPlace: Frame GND | SWO | NRST | DIO | GND | CLK | V3P3A | GND | V3P3A | Boot | Flash | TXD | RXD | V3P3 | NRST | GND | PB6 | PB5 | PD7 | PD6 | PD5 | PD4 | PD3 | PD2 | X | X | PE2 | PC12 | PC11 | PE3 | ON | OFF | PC10 | X | PE4 | PE6 | PA10 | PA9 | PA8 | PC9 | PC8 | PC7 | PD15 | PD14 | PD13 | PD11 | PC1 | PD10 | PD9 | PC2 | PD8 | PD14 | PC3 | PD13 | PD12 | PWM1 | PA1 | PA2 | PA3 | GND | GND | V3P3B | PWM2 | GND | PWM3 | GND | PE9 | GND | PC6 | GND | PE5 | GND | PB15 | GND | PWM4 | GND | PC15 | PA7 | PC5 | PA7 | PE7 | PA7 | PC11 | PA13_2 | + | + | PA4 | PC4 | PB0 | PB2 | PE8 | PC10 | PA12 | PC14_2 | - | - | V5 | GND | MARI Quadcopter CSUEB CMPE 492 | Seth Iris Canonigo | Nahom Solomon | Christopher Ruiz-Guerra | Connor Prior | VSS | VDD | VSS | VDD | VSS | VDD | VSS | VDD | VSS | VDD
tNames: U4